# Altium PCB led_board.PcbDoc
Units mm, origin at the board's own origin, x right, y up, seen from the top; angles counter-clockwise.
Board outline 68.58 x 54.61 mm, 2 copper layers (Top Layer, Bottom Layer); 26 components, 12 nets, 96 pads, 6 vias.
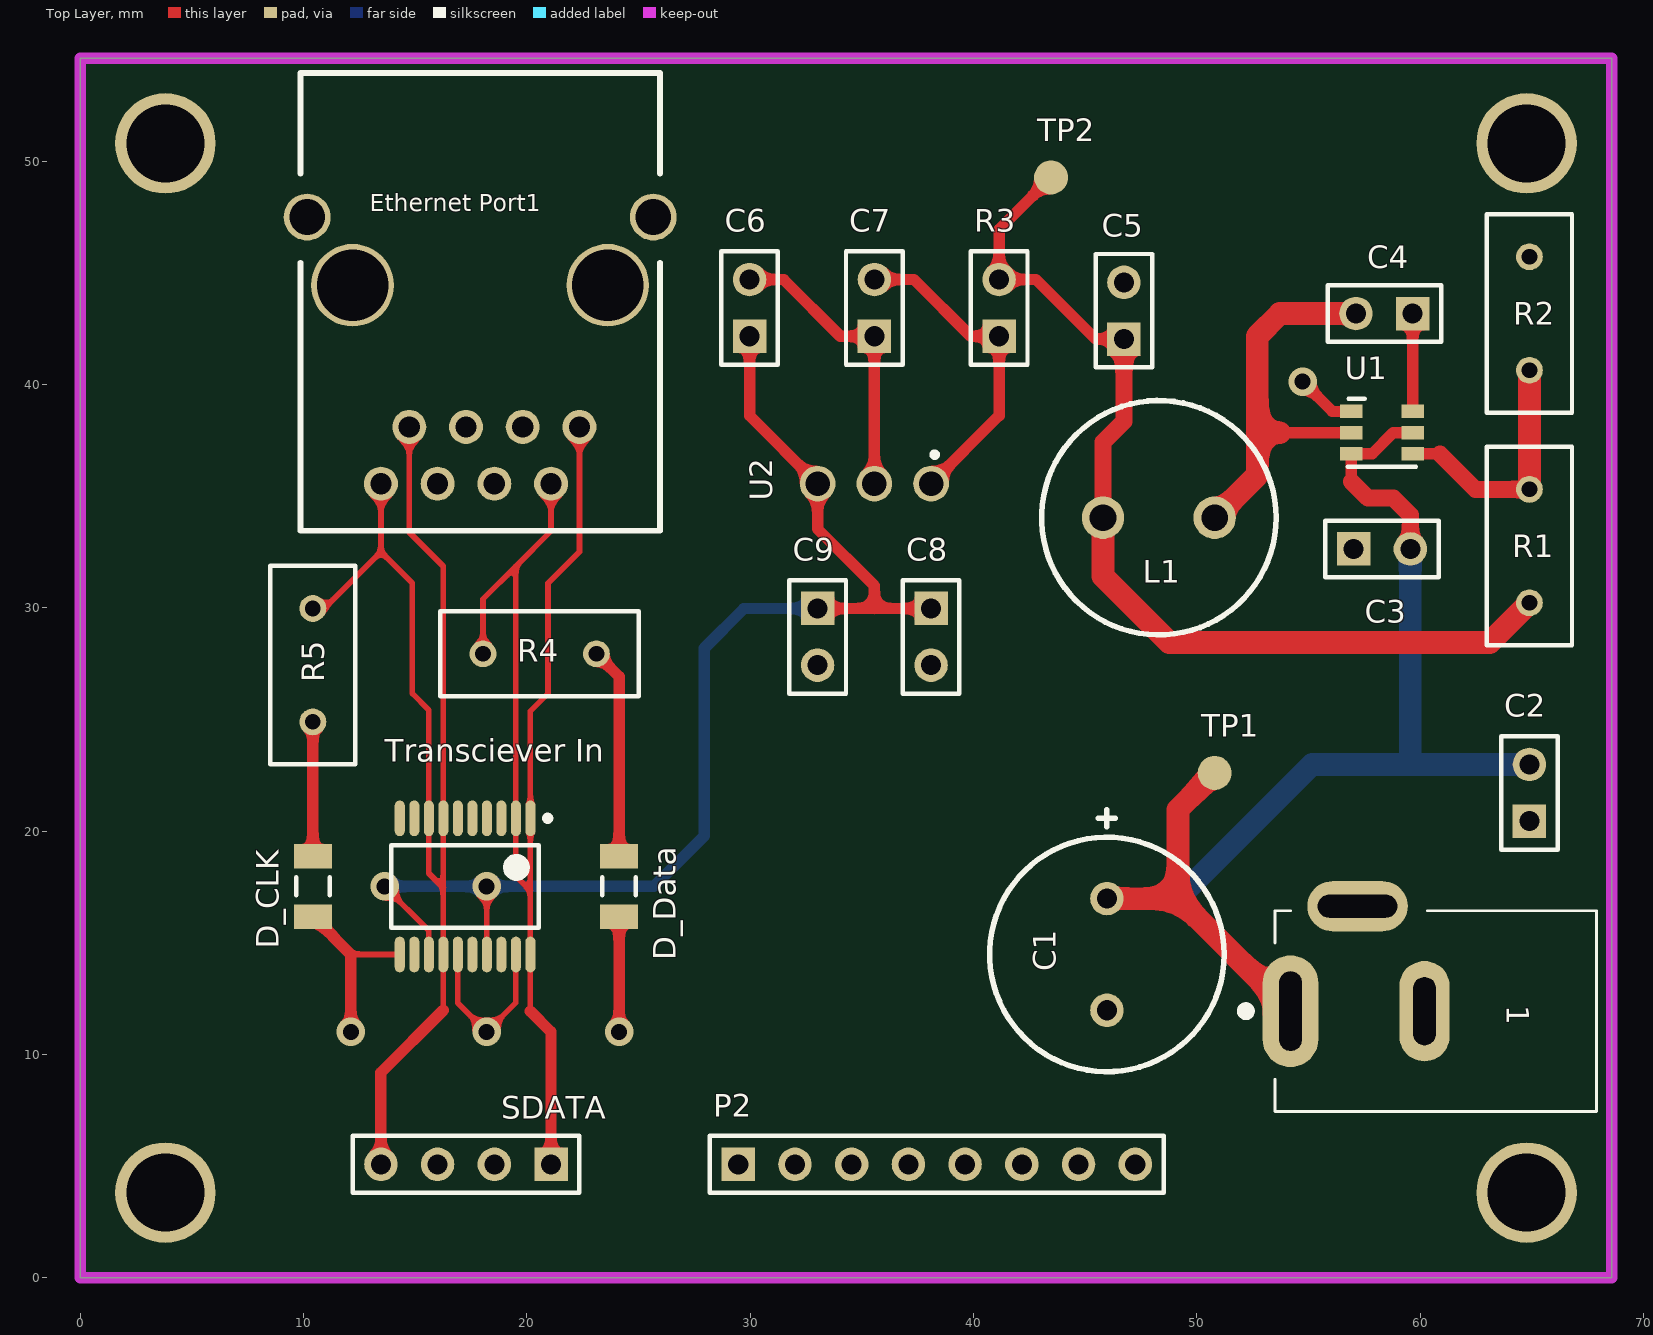
[diagram p0: Top Layer view]
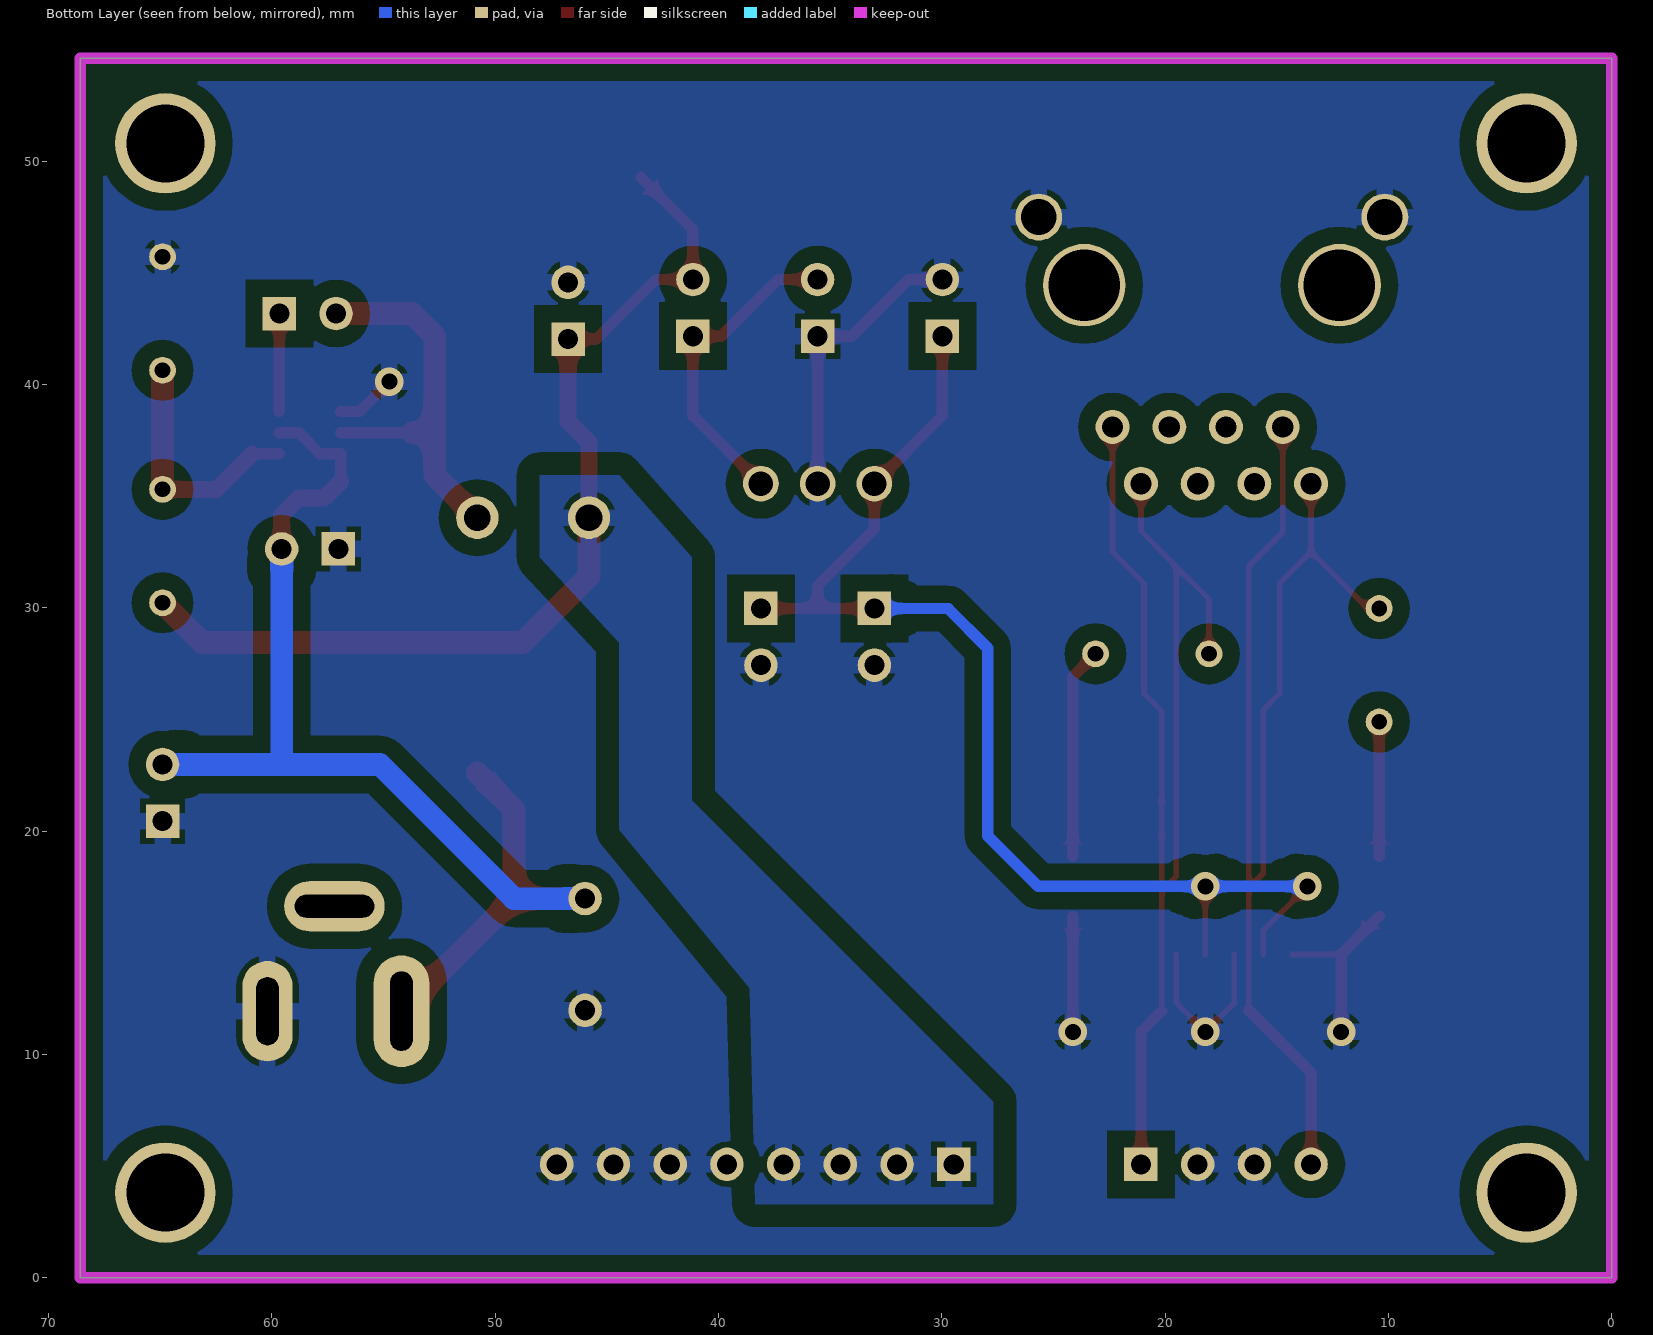
[diagram p1: Bottom Layer view, seen from below]

## Layer stack, top to bottom
Top Solder: solder mask 0.0102, Solder Resist, Dk 3.5
Top Layer: signal copper 0.0356
Dielectric 1: dielectric 0.32, FR-4, Dk 4.8
Bottom Layer: signal copper 0.0356
Bottom Solder: solder mask 0.0102, Solder Resist, Dk 3.5

## Board outline
0,0 68.58,0 68.58,54.61 0,54.61

## Design rules (kind name [scope] priority, off if disabled: settings)
Clearance [All] p1: gap=0.254 ignorepadtopadclearanceinfootprint=TRUE except(0.762: Arc-Fill Arc-Poly Arc-Region Track-Fill Track-Poly Track-Region SMDPad-Fill SMDPad-Poly SMDPad-Region THPad-Fill THPad-Poly THPad-Region Via-Fill Via-Poly Via-Region; 1.016: Fill-Fill Fill-Poly Fill-Region Poly-Poly Poly-Region Region-Region)
PlaneConnect [All] p1: planeconnectstyle=Relief reliefexpansion=0.508 reliefentries=4 reliefconductorwidth=0.762 reliefairgap=0.254
PolygonConnect [All] p1: connectstyle=Relief reliefconductorwidth=0.762 reliefentries=4 polygonreliefangle="90 Angle" airgapwidth=0.254
RoutingVias [All] p1: holewidth=0.711 width=1.27 viastyle="Through Hole" minholewidth=0.711 minwidth=1.27 maxholewidth=0.711 maxwidth=1.27
SolderMaskExpansion [All] p1: expansion=0.102
UnRoutedNet [All] p1: checkbadconnections=TRUE
Width [All] p1: maxlimit=1.778 minlimit=0.254 preferedwidth=0.508
28 further rules are at their usual default settings.

## Components (designator, comment, footprint, x,y, rotation, side; value= is the part's Value field where it differs from the comment)
1 "PJ-002AH" PJ-002AH 52.198,11.938 r0 top
C1 "47uF" "Pol Cap 5mm-10mm" 45.974,14.478 r270 top
C2 "Cap" HDR1X2 64.897,20.447 r90 top value=100nF
C3 "Cap" HDR1X2 57.023,32.639 r0 top value=10uF
C4 "Cap" HDR1X2 59.668,43.18 r180 top value=100nF
C5 "47uF" HDR1X2 46.736,42.037 r90 top
C6 "47uF" HDR1X2 29.972,42.164 r90 top
C7 "Cap" HDR1X2 35.56,42.164 r90 top value=.47uF
C8 "Cap" HDR1X2 38.1,29.972 r270 top value=100nF
C9 "Cap" HDR1X2 33.02,29.972 r270 top value=100nF
D_CLK "Diode" C1206 10.414,17.526 r270 top
D_Data "Diode" C1206 24.13,17.526 r270 top
"Ethernet Port1" "RJ45" RJ45 12.192,44.45 r270 top
L1 "Inductor" RB5-10.5 48.3,34.036 r180 top value=3.3uH
P2 "Header 8" HDR1X8 29.464,5.08 r0 top
R1 "" RAD-0.2 64.897,32.766 r270 top value=56.2k
R2 "" RAD-0.2 64.897,43.18 r270 top value=10k
R3 "" HDR1X2 41.148,42.164 r90 top value="0 Ohm"
R4 "" RAD-0.2 20.574,27.94 r180 top value=680
R5 "" RAD-0.2 10.414,27.432 r90 top value=680
SDATA "Header 4" HDR1X4 21.082,5.08 r180 top (schematic designator P1)
TP1 "Test Point" "Test Point" 50.8,22.606 r0 top
TP2 "Test Point" "Test Point" 43.474,49.276 r90 top
"Transciever In" "SN65LVDT14" SN65LVDT41 17.231,17.526 r270 top
U1 "TPS563200DDCR" DDC0006A 58.293,37.846 r0 top
U2 "LM3940" LM3940 35.56,35.56 r90 top

## Footprints (in the part's own frame and the unit in brackets; to place one, negate y for a bottom-side part, rotate by r counter-clockwise, add the part's x,y. Pads: shape width x height; smd on the part's side, far side on the other; paste and mask are expansions set on the pad)
C1206 [mm] "Chip Capacitor, Body 3.2x1.6mm, IPC High Density"
  rect 1.1x1.7 smd: 1(-1.35,0) 2(1.35,0)
  silkscreen extent -0.4,-0.75 0.4,0.75, body extent -1.7,-0.9 1.7,0.9, height 1.3
DDC0006A [mm]
  rect 1x0.6 smd paste+0 mask+0.051: 1(-1.375,0.95) 2(-1.375,0) 3(-1.375,-0.95) 4(1.375,-0.95) 5(1.375,0) 6(1.375,0.95)
  silkscreen extent -1.52,-1.52 1.52,1.52, body extent -1.5,-1.5 1.5,1.5, height 0.25
HDR1X2 [mm] "Connector; Header; 2 Position"
  rect 1.5x1.5 hole 0.9: 1(0,0)
  round 1.5 hole 0.9: 2(2.54,0)
  silkscreen extent -1.27,-1.27 3.81,1.27
HDR1X4 [mm] "Connector; Header; 4 Position"
  rect 1.5x1.5 hole 0.9: 1(0,0)
  round 1.5 hole 0.9: 2(2.54,0) 3(5.08,0) 4(7.62,0)
  silkscreen extent -1.27,-1.27 8.89,1.27
HDR1X8 [mm] "Connector; Header; 8 Position"
  rect 1.5x1.5 hole 0.9: 1(0,0)
  round 1.5 hole 0.9: 2(2.54,0) 3(5.08,0) 4(7.62,0) 5(10.16,0) 6(12.7,0) 7(15.24,0) 8(17.78,0)
  silkscreen extent -1.27,-1.27 19.05,1.27
LM3940 [mm]
  round 1.6 hole 1.1: 1(0,-2.54) 2(0,0) 3(0,2.54)
  silkscreen extent 1.19,-2.81 1.41,-2.59
PJ-002AH [mm] "PJ-002AH"
  oval 2.5x5 hole 1.016 slot 3.556 at 90 deg: 1(2,0)
  oval 2.25x4.5 hole 1.016 slot 3.048 at 90 deg: 2(8,0)
  oval 4.5x2.25 hole 1.016 slot 3.556 at 0 deg: 3(5,4.7)
  silkscreen extent -0.2,-4.5 15.7,4.5
"Pol Cap 5mm-10mm" [mm]
  round 1.5 hole 0.9: 1(-2.5,0) 2(2.5,0)
  silkscreen extent -6.48,-5.25 5.25,5.25
RAD-0.2 [mm] "Radial Cap, Thru-Hole; 2 Leads; 0.2 in Pin Spacing"
  round 1.2 hole 0.7: 1(-2.54,0) 2(2.54,0)
  silkscreen extent -4.44,-1.91 4.44,1.91
RB5-10.5 [mm] "Capacitor (Radial); 2 Leads"
  round 1.9 hole 1.2: 1(-2.5,0) 2(2.5,0)
  silkscreen extent -5.25,-5.25 5.25,5.25
RJ45 [mm] "Ethernet/Cat5e 8p8c"
  round 1.524 hole 0.95: 1(6.35,10.16) 2(8.89,8.89) 3(6.35,7.62) 4(8.89,6.35) 5(6.35,5.08) 6(8.89,3.81) 7(6.35,2.54) 8(8.89,1.27)
  round 2.1 hole 1.6: SGND(-3.05,13.465) SGND(-3.05,-2.035)
  round 3.7 hole 3.2: ""(0,11.43) ""(0,0)
  silkscreen extent -9.5,-2.33 11,13.76
SN65LVDT41 [mm] "TSOP, 20-Leads, Body 6.50x4.40mm, Pitch 0.65mm, IPC Medium Density"
  oval 1.6x0.45 smd: 1(-3.05,2.925) 2(-3.05,2.275) 3(-3.05,1.625) 4(-3.05,0.975) 5(-3.05,0.325) 6(-3.05,-0.325) 7(-3.05,-0.975) 8(-3.05,-1.625) 9(-3.05,-2.275) 10(-3.05,-2.925) 11(3.05,-2.925) 12(3.05,-2.275) 13(3.05,-1.625) 14(3.05,-0.975) 15(3.05,-0.325) 16(3.05,0.325) 17(3.05,0.975) 18(3.05,1.625) 19(3.05,2.275) 20(3.05,2.925)
  silkscreen extent -3.17,-3.3 1.85,3.83, body extent -2.25,-3.3 2.25,3.3, height 1.2
"Test Point" [mil]
  round 60 smd: TP(0,0)

## Part data
C1 C5 C6: library part UUQ1C470MCL1GB, "UUQ1C470MCL1GB"
C2 C3 C4 C7 C8 C9: "Capacitor", LatestRevisionDate=17-Jul-2002, LatestRevisionNote="Re-released for DXP Platform.", PackageDescription="Radial Cap, Thru-Hole; 2 Leads; 0.3 in Pin Spacing", PackageReference=RAD-0.3, Published=8-Jun-2000, Publisher="Altium Limited"
D_CLK D_Data: "Default Diode", Code_JEDEC=DO-214-AB, LatestRevisionDate=17-Jul-2002, LatestRevisionNote="Re-released for DXP Platform.", PackageDescription="DO-214-AB/SMC; 2 C-Bend Leads; Body 7.9 x 5.9 mm, inc. leads (LxW)", PackageReference=SMC, PackageVersion=Sep-1996, Published=8-Jun-2000, Publisher="Altium Limited"
P2: "Header, 8-Pin", LatestRevisionDate=17-Jul-2002, LatestRevisionNote="Re-released for DXP Platform.", Publisher="Altium Limited"
R1 R2 R3 R4 R5: library part Res3, "Resistor", LatestRevisionDate=29-May-2009, LatestRevisionNote="IPC-7351 Footprint Added.", PackageDescription="Chip Resistor", PackageReference=J1-0603, Published=8-Jun-2000, Publisher="Altium Limited"
SDATA: "Header, 4-Pin", LatestRevisionDate=17-Jul-2002, LatestRevisionNote="Re-released for DXP Platform.", Publisher="Altium Limited"
U1: "17 V Input, 3A Synchronous Step-Down Regulator in SOT-23 with Advanced Eco-mode? 6-SOT -40 to 85", Package="TSOT-23 Texas Instruments", Digi-Key_Part_Number=296-43663-1-ND, Digi-Key_Purchase_URL=https://www.digikey.com/product-detail/en/texas-instruments/TPS563200DDCR/296-43663-1-ND/5864733?utm_source=snapeda&utm_medium=aggregator&utm_campaign=symbol, MF="Texas Instruments", MP=TPS563200DDCR, SnapEDA_Link=https://www.snapeda.com/parts/TPS563200DDCR/Texas%20Instruments/view-part/?ref=snap
L1: Code_IEC=1005, Code_JEITA=0402, LatestRevisionDate=29-May-2009, LatestRevisionNote="IPC-7351 Footprint Added.", PackageDescription="Chip Inductor", PackageReference=0402-A, Published=8-Jun-2000, Publisher="Altium Limited"

## Free pads (board coordinates)
  round 4.5 hole 3.5: Mount(3.81,3.81) Mount(3.81,50.8) Mount(64.77,3.81) Mount(64.77,50.8)

## Via types
v1: diameter 1.27, hole 0.711, Top Layer to Bottom Layer, 6 vias

## Nets (pads, with @x,y where several pads share a name; then routed paths per layer and width w, separated by ;. In a path a pad name is that pad's centre, name@x,y a point inside that pad or via, vN(x,y) a via of type N, cw(c..) or ccw(c..) an arc to the next point about the centre after c; other vN are vias at no path point)
+3V3: "Transciever In.13" "Transciever In.17" C6.1 C8.1 C9.1 U2.3 | length 56
  Top Layer w0.254: v1(13.629,17.526) 15.606,15.549 15.606,14.476 ; v1(18.198,17.526) 18.198,14.484 18.206,14.476
  Top Layer w0.508: C6.1 29.972,38.608 U2.3 33.02,33.528 35.56,30.988 35.56,29.972 ; C9.1 35.56,29.972 ; C8.1 35.56,29.972
  Bottom Layer w0.508: v1(13.629,17.526) v1(18.198,17.526) 25.68,17.526 27.94,19.786 27.94,28.194 29.718,29.972 C9.1
+5V: C5.1 L1.2 P2.1 P2.2 P2.3 P2.4 R1.2 R3.2 TP2.TP | length 44.3
  Top Layer w0.508: TP2.TP 41.148,46.95 R3.2 42.799,44.704 45.466,42.037 C5.1
  Top Layer w0.762: L1.2 45.8,37.418 46.736,38.354 C5.1
  Top Layer w1.016: L1.2 45.8,31.416 48.768,28.448 63.119,28.448 R1.2
+9V: 1.1 C1.1 C2.2 C3.2 TP1.TP U1.3 U1.5 | length 56.8
  Top Layer w0.508: 56.918,35.665 U1.3 57.851,36.896 58.801,37.846 U1.5
  Top Layer w0.762: 56.918,35.665 57.658,34.925 58.801,34.925 59.563,34.163 C3.2
  Top Layer w1.016: C1.1 49.158,16.978 ; TP1.TP 49.158,20.964 49.158,16.978 ; 1.1 49.158,16.978
  Bottom Layer w1.016: C1.1 49.156,16.978 55.165,22.987 59.563,22.987 ; C3.2 59.563,22.987 ; C2.2 59.563,22.987
GND: 1.2 "Ethernet Port1.SGND" "Transciever In.11" "Transciever In.15" "Transciever In.19" C1.2 C2.1 C3.1 C5.2 C6.2 C7.1 C8.2 C9.2 D_CLK.2 D_Data.2 P2.5 P2.6 P2.7 P2.8 R2.1 SDATA.2 SDATA.3 U1.1 U2.2 | length 37.2
  Top Layer w0.254: 12.114,14.476 14.306,14.476 ; 16.906,14.476 16.906,12.304 v1(18.198,11.012) 19.506,12.32 19.506,14.476
  Top Layer w0.508: D_CLK.2 12.114,14.476 v1(12.114,11.012) ; v1(24.13,11.012) D_Data.2 ; C6.2 31.496,44.704 34.036,42.164 C7.1 U2.2 ; v1(54.737,40.132) 56.073,38.796 U1.1
NetC4_1: C4.1 U1.6 | length 4.4
  Top Layer w0.508: U1.6 C4.1
NetC4_2: C4.2 L1.1 U1.2 | length 18
  Top Layer w0.508: 53.754,37.813 53.721,37.846 U1.2
  Top Layer w1.016: L1.1 52.705,35.941 52.705,37.846 ; 53.721,37.846 52.705,37.846 ; C4.2 53.721,43.18 52.705,42.164 52.705,37.846
NetC7_2: C7.2 R3.1 U2.1 | length 14.5
  Top Layer w0.508: C7.2 37.338,44.704 39.878,42.164 R3.1 41.148,38.608 U2.1
NetD_CLK_1: D_CLK.1 R5.1 | length 6
  Top Layer w0.508: D_CLK.1 R5.1
NetD_Data_1: D_Data.1 R4.1 | length 9.5
  Top Layer w0.508: R4.1 24.13,26.924 D_Data.1
NetR1_1: R1.1 R2.2 U1.4 | length 11.2
  Top Layer w0.508: U1.4 60.894,36.896
  Top Layer w0.762: 60.894,36.896 62.484,35.306 R1.1
  Top Layer w1.016: R1.1 R2.2
SPIA_CLK: "Ethernet Port1.7" "Ethernet Port1.8" "Transciever In.7" "Transciever In.8" "Transciever In.14" R5.2 SDATA.4 | length 58.2
  Top Layer w0.254: R5.2 10.922,29.972 13.462,32.512 ; 13.462,35.56 13.462,32.512 ; 14.732,38.1 14.732,33.386 16.256,31.862 16.256,20.576 16.256,17.466 ; 16.256,11.979 16.256,14.476 16.256,17.466 ; 13.462,32.512 14.87,31.104 14.87,26.162 15.606,25.426 15.606,20.576 15.606,18.116 16.256,17.466
  Top Layer w0.508: SDATA.4 13.462,9.185 16.256,11.979
SPIA_Data: "Ethernet Port1.1" "Ethernet Port1.2" "Transciever In.1" "Transciever In.2" "Transciever In.20" R4.2 SDATA.1 | length 58
  Top Layer w0.254: R4.2 18.034,30.39 19.506,31.862 ; 20.156,11.938 20.156,14.476 20.156,17.324 ; 21.082,35.56 21.082,33.438 19.506,31.862 ; 22.352,38.1 22.352,32.512 20.944,31.104 20.944,26.162 20.156,25.374 20.156,20.576 20.156,17.324 ; 19.506,31.862 19.506,20.576 19.506,17.974 20.156,17.324
  Top Layer w0.508: 20.156,11.938 21.082,11.012 SDATA.1
pads on no net: 1.3 "Ethernet Port1.3" "Ethernet Port1.4" "Ethernet Port1.5" "Ethernet Port1.6" "Ethernet Port1." "Transciever In.3" "Transciever In.4" "Transciever In.5" "Transciever In.6" "Transciever In.9" "Transciever In.10" "Transciever In.12" "Transciever In.16" "Transciever In.18"

## Polygon pours and split planes (outlines as drawn)
GND on Bottom Layer "Bottom Layer-GND" (solid, pour order 8): 68.58,0 68.58,54.61 0,54.61 0,0
+5V on Bottom Layer "Top Layer-+5V" (solid, pour order 4): 27.686,3.302 38.354,3.302 38.608,12.954 44.45,20.066 44.45,28.448 48.006,32.258 48.006,34.036 48.006,35.941 44.45,35.941 41.188,32.258 41.188,21.376 27.686,7.874

## Keep-outs
Keep-Out Layer:
  the board outline again, w0.508